# Altium PCB PowerManager.PcbDoc
Units mil, origin at the board's own origin, x right, y up, seen from the top; angles counter-clockwise.
Board outline 7800 x 4100 mil, 2 copper layers (Top Layer, Top, Bottom Layer, Bottom); 14 components, 10 nets, 34 pads, 0 vias.
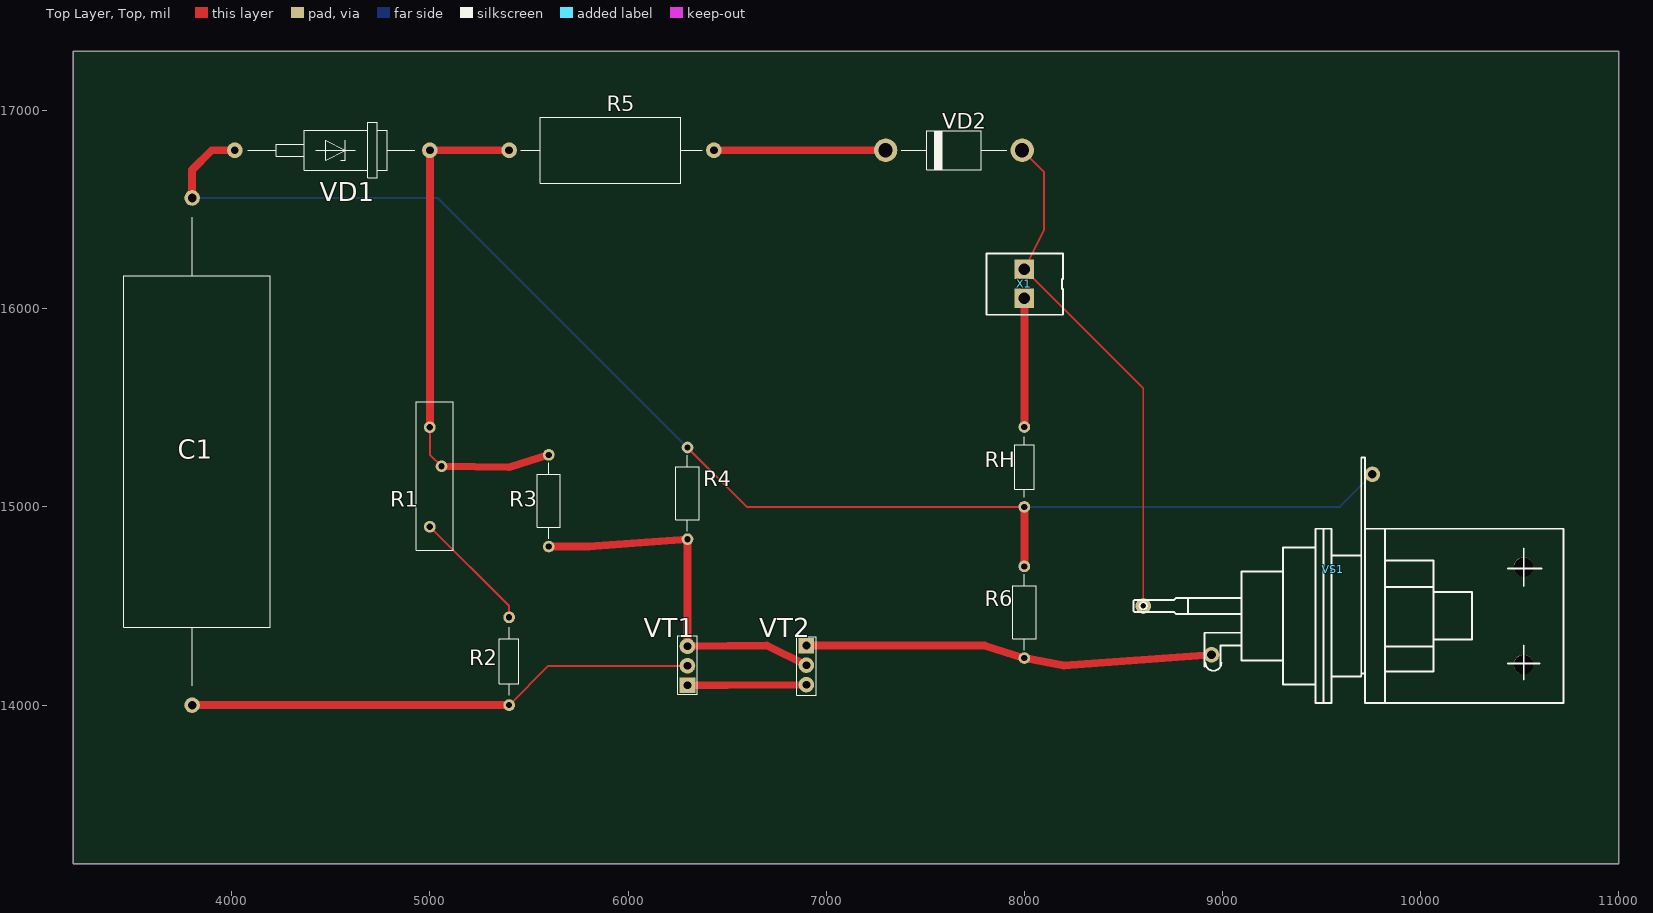
[diagram p0: Top Layer, Top view]
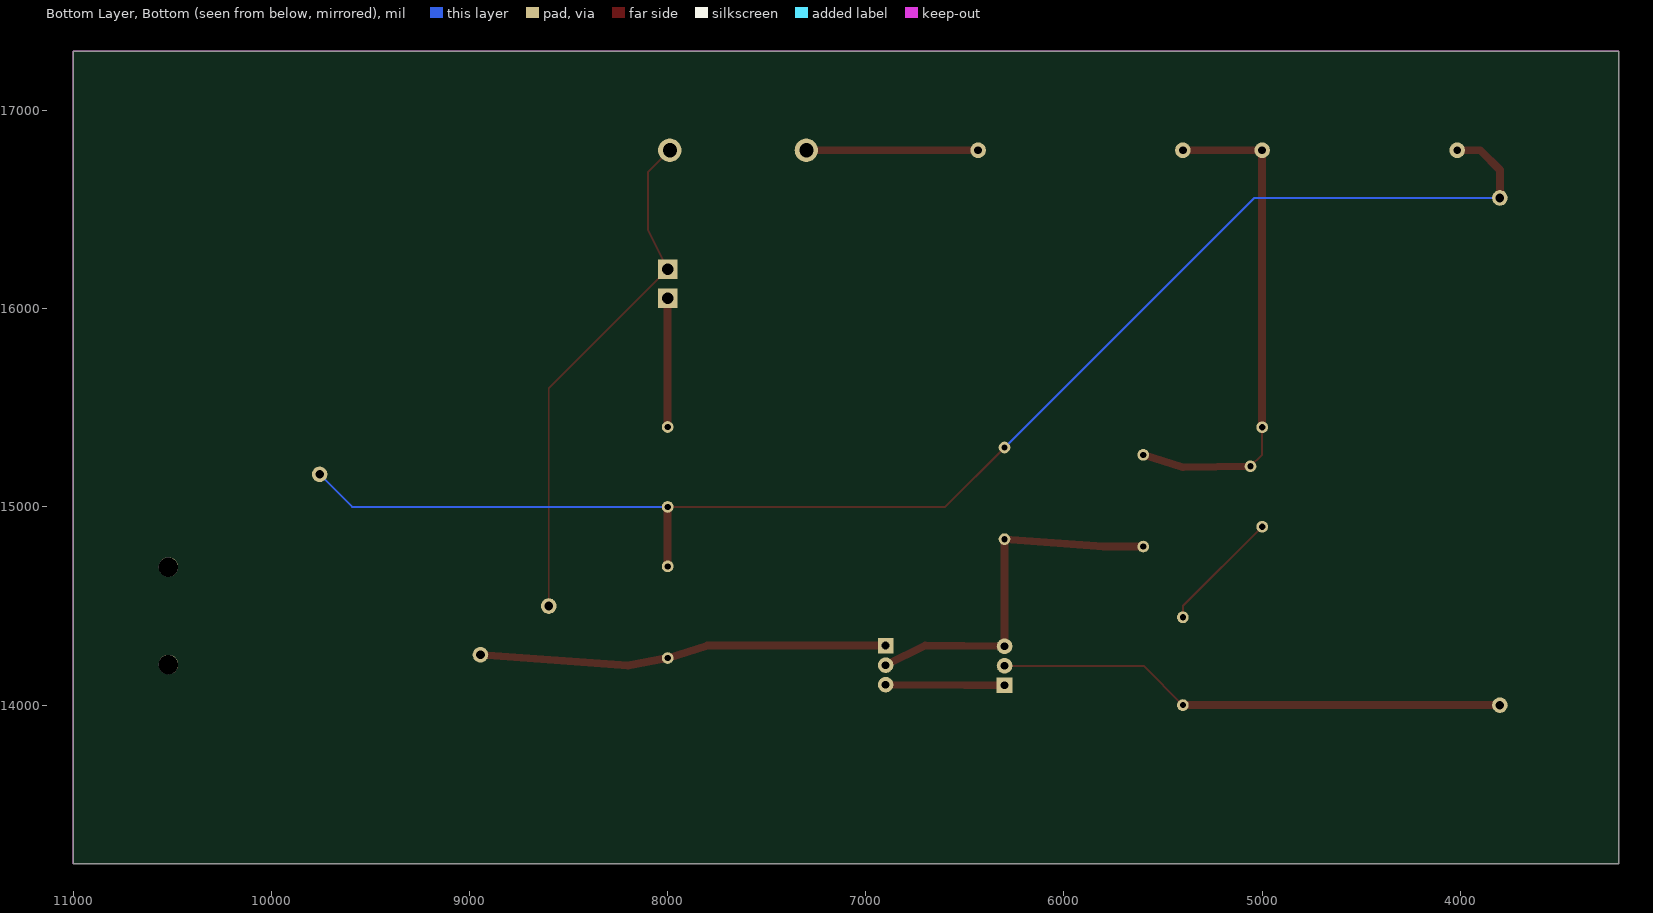
[diagram p1: Bottom Layer, Bottom view, seen from below]

## Layer stack, top to bottom
Top Solder, Top Mask: solder mask 0.4, Solder Resist, Dk 3.5
Top Layer, Top: signal copper 1.4
Dielectric 1: dielectric 12.6, FR-4, Dk 4.8
Bottom Layer, Bottom: signal copper 1.4
Bottom Solder, Bot Mask: solder mask 0.4, Solder Resist, Dk 3.5

## Board outline
3200,17300 3200,13200 11000,13200 11000,17300

## Design rules (kind name [scope] priority, off if disabled: settings)
Clearance [All] p1: gap=10 ignorepadtopadclearanceinfootprint=FALSE except(0: Arc-Hole Track-Hole SMDPad-Hole THPad-Hole Via-Hole Fill-Hole Poly-Hole Region-Hole Text-Hole; 11.81: Arc-Arc Arc-Track Arc-THPad Arc-Via Track-Track Track-THPad Track-Via THPad-THPad THPad-Via Via-Via)
PlaneClearance [All] p1: clearance=10
PolygonConnect [All] p1: connectstyle=Relief reliefconductorwidth=10 reliefentries=4 polygonreliefangle="90 Angle" airgapwidth=10
RoutingVias [All] p1: holewidth=28 width=50 viastyle="Through Hole" minholewidth=28 minwidth=50 maxholewidth=28 maxwidth=50
SolderMaskExpansion [All] p1: expansion=4
Width [All] p1: maxlimit=10 minlimit=10 preferedwidth=10
29 further rules are at their usual default settings.

## Components (designator, comment, footprint, x,y, rotation, side; value= is the part's Value field where it differs from the comment)
C1 "0,1mk" K73-11-160В-4,7МКФ 3800,14000 r90 top
R1 "100k" 3006P 5000,14900 r90 top
R2 "4,7k" C2-33H-0.125W 5400,14000 r90 top
R3 "3k" C2-33H-0.25W 5600,14800 r90 top
R4 "3k" C2-33H-0.25W 6300,15300 r270 top
R5 "30k" C2-33H-2W 5400,16800 r0 top
R6 "100" C2-33H-0.25W 8000,14700 r270 top
RH "" C2-33H-0.125W_10MM 8000,15000 r90 top
VD1 "D818B" Д818_Д818А(Primary) 5000,16800 r180 top
VD2 "KD105B" КД105_КД105Б(Primary) 7300,16800 r0 top
VS1 "" KU202R 8600,14500 r180 top
VT1 "KT361" KT13_КТ361А(Primary) 6300,14100 r0 top
VT2 "KT315" KT13_КТ315А(Primary) 6900,14300 r180 top
X1 "" PW15-2M 8000,16200 r180 top

## Footprints (in the part's own frame and the unit in brackets; to place one, negate y for a bottom-side part, rotate by r counter-clockwise, add the part's x,y. Pads: shape width x height; smd on the part's side, far side on the other; paste and mask are expansions set on the pad)
3006P [mm]
  round 1.5 hole 0.8: 1(0,0) 2(7.75,-1.5) 3(12.75,0)
  silkscreen extent -3,-3 16,1.75
C2-33H-0.25W [mm]
  round 1.5 hole 0.8: 1(0,0) 2(11.75,0)
  silkscreen extent 1,-1.5 10.75,1.5
C2-33H-0.125W [mm]
  round 1.5 hole 0.8: 1(0,0) 2(11.25,0)
  silkscreen extent 1.25,-1.25 10,1.25
C2-33H-0.125W_10MM [mm]
  round 1.5 hole 0.8: 1(0,0) 2(10.25,0)
  silkscreen extent 1.25,-1.25 9,1.25
C2-33H-2W [mm]
  round 2 hole 1: 1(0,0) 2(26.25,0)
  silkscreen extent 1.5,-4.25 24.75,4.25
K73-11-160В-4,7МКФ [mm]
  round 2 hole 1.1: 1(0,0) 2(65,0)
  silkscreen extent 2.5,-10 62.5,8.75
KT13_КТ315А(Primary) [mm]
  rect 2x2 hole 1: 1(0,0)
  round 2 hole 1: 2(0,5) 3(0,2.5)
  silkscreen extent -1.25,-1.17 1.25,6.33
KT13_КТ361А(Primary) [mm]
  round 2 hole 1: 1(0,2.5) 2(0,5)
  rect 2x2 hole 1: 3(0,0)
  silkscreen extent -1.25,-1.17 1.25,6.33
KU202R [mm]
  round 2 hole 1.1: 1(-29.375,-16.875) 2(0,0) 3(-8.75,6.25)
  round 2.5 hole 2.5: 4(-48.75,7.5) 5(-48.75,-5)
  silkscreen extent -53.85,-19.05 1.27,12.45
PW15-2M [mm]
  rect 2.5x2.5 hole 1.5: 1(0,0) 2(0,3.75)
  silkscreen extent -4.95,-2.03 4.83,5.85
Д818_Д818А(Primary) [mm]
  round 2 hole 1: A(25,0) K(0,0)
  silkscreen extent 1.94,-3.56 23.36,3.56
КД105_КД105Б(Primary) [mm]
  round 3 hole 1.8: A(17.5,0) K(0,0)
  silkscreen extent 2,-2.5 15.5,2.5

## Nets (pads, with @x,y where several pads share a name; then routed paths per layer and width w, separated by ;. In a path a pad name is that pad's centre, name@x,y a point inside that pad or via, vN(x,y) a via of type N, cw(c..) or ccw(c..) an arc to the next point about the centre after c; other vN are vias at no path point)
+220B: RH.2 X1.2 | length 648.8
  Top Layer, Top w39.37: RH.2 X1.2
NET00000: VT1.3 VT2.2 | length 600
  Top Layer, Top w39.37: VT1.3 6500,14100 VT2.2
NET00001: R1.1 R2.2 | length 622.8
  Top Layer, Top w10: R1.1 5400,14500 R2.2
NET00002: R5.2 VD2.K | length 866.5
  Top Layer, Top w39.37: R5.2 VD2.K
NET00003: VD2.A VS1.2 X1.1 | length 2618.1
  Top Layer, Top w10: VD2.A 8100,16688.98 8100,16400 X1.1 8600,15600 VS1.2
NET00004: R3.1 R4.2 VT1.2 VT2.3 | length 1864.9
  Top Layer, Top w39.37: R3.1 5800,14800 R4.2 VT1.2 6700,14300 VT2.3
NET00005: C1.1 R2.1 VT1.1 | length 2582.2
  Top Layer, Top w10: R2.1 5598.43,14198.43 VT1.1
  Top Layer, Top w39.37: C1.1 R2.1
NET00006: C1.2 R4.1 R6.1 RH.1 VD1.A VS1.1 | length 7368.5
  Top Layer, Top w10: R4.1 6600,15000 RH.1
  Top Layer, Top w39.37: C1.2 3800,16700 3900,16800 VD1.A ; R6.1 RH.1
  Bottom Layer, Bottom w10: C1.2 5040.94,16559.06 R4.1 ; RH.1 9592.13,15000 VS1.1
NET00008: R6.2 VS1.3 VT2.1 | length 2059.5
  Top Layer, Top w39.37: VT2.1 7800,14300 R6.2 8200,14200 VS1.3
NET00010: R1.2 R1.3 R3.2 R5.1 VD1.K | length 2569.9
  Top Layer, Top w10: R1.3 5000,15264.17 R1.2
  Top Layer, Top w39.37: R1.3 VD1.K R5.1 ; R1.2 5400,15200 R3.2
pads on no net: VS1.4 VS1.5

## Keep-outs
Keep-Out Layer, Board:
  the board outline again, w5

## Text inside footprints (layer, text, board x,y; h text height)
VT1: Mechanical 1, Top Assy "Э" at 6211.42,14073.62 h78.12; Mechanical 1, Top Assy "К" at 6211.42,14181.89 h78.12; Mechanical 1, Top Assy "Б" at 6211.42,14280.32 h78.12
VT2: Mechanical 1, Top Assy "Э" at 6988.58,14326.38 h78.12 r180; Mechanical 1, Top Assy "К" at 6988.58,14218.11 h78.12 r180; Mechanical 1, Top Assy "Б" at 6988.58,14119.68 h78.12 r180